# Altium PCB pcb.PcbDoc
Units mil, origin at the board's own origin, x right, y up, seen from the top; angles counter-clockwise.
Board outline 1968.5 x 885.83 mil, 2 copper layers (Top Layer, Bottom Layer); 32 components, 29 nets, 182 pads, 28 vias.
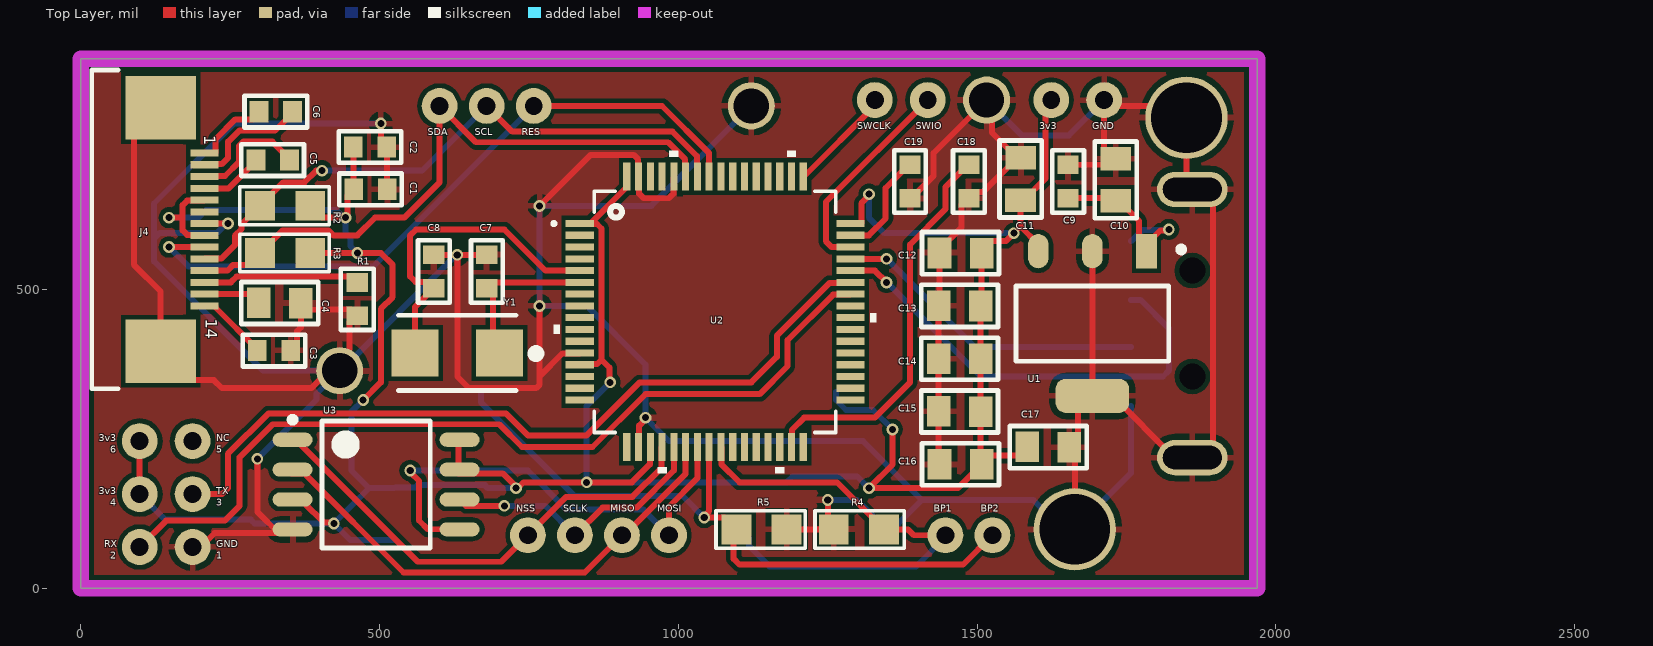
[diagram p0: Top Layer view]
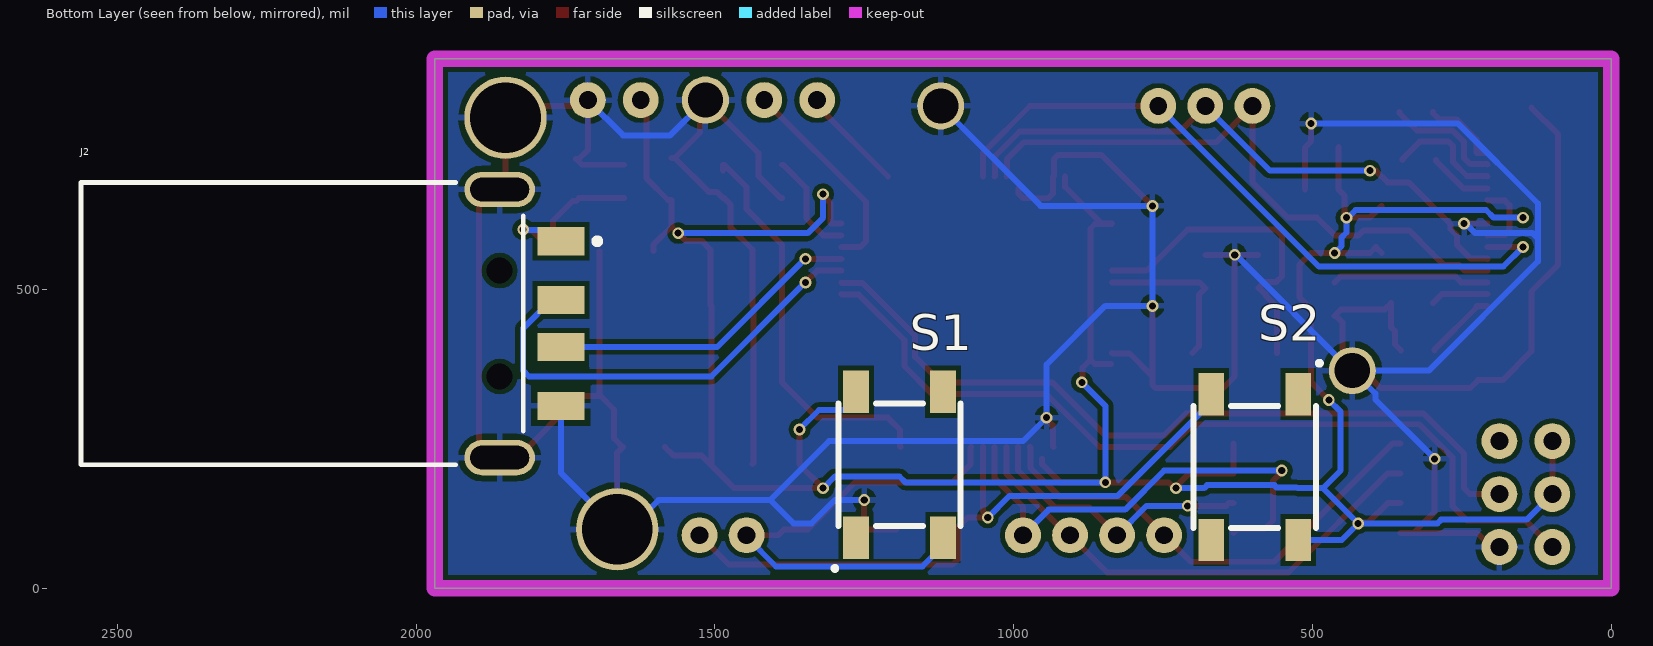
[diagram p1: Bottom Layer view, seen from below]
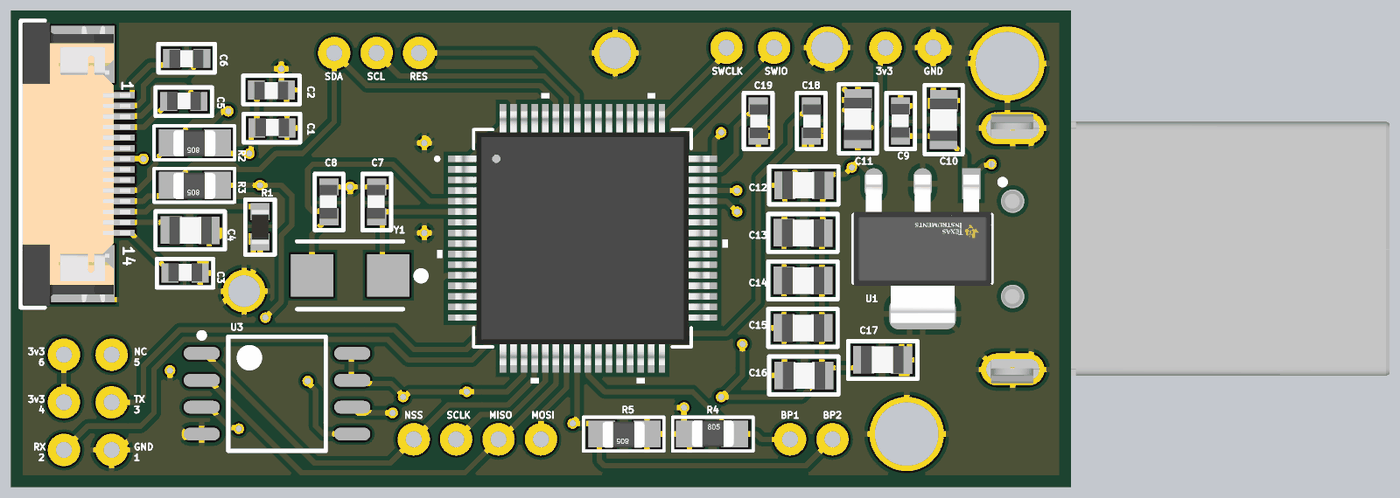
[diagram p2: 3D render of the assembled board from above, using the file's embedded part models]

## Layer stack, top to bottom
Top Solder: solder mask 0.4, Solder Resist, Dk 3.5
Top Layer: signal copper 1.4
Dielectric 1: dielectric 12.6, FR-4, Dk 4.8
Bottom Layer: signal copper 1.4
Bottom Solder: solder mask 0.4, Solder Resist, Dk 3.5

## Board outline
0,0 0,885.83 1968.5,885.83 1968.5,0
cut-out: 1285,1639.84

## Design rules (kind name [scope] priority, off if disabled: settings)
Clearance [All] p1: gap=7.87 ignorepadtopadclearanceinfootprint=FALSE
PolygonConnect [All] p1: connectstyle=Relief reliefconductorwidth=10 reliefentries=4 polygonreliefangle="90 Angle" airgapwidth=10
RoomDefinition mainSheet [InComponentClass('mainSheet')] p1: confinementstyle=ConfineIn formatcopy=TRUE lockcomponents=FALSE outline 77.58,1228.78 1793.58,1228.78 1793.58,2218.78 77.58,2218.78
RoutingVias [All] p1: holewidth=19.68 width=19.68 viastyle="Through Hole" minholewidth=11.81 minwidth=19.68 maxholewidth=28 maxwidth=50
SolderMaskExpansion [All] p1: expansion=4
Width [All] p1: maxlimit=25 minlimit=1 preferedwidth=10
30 further rules are at their usual default settings.

## Components (designator, comment, footprint, x,y, rotation, side; value= is the part's Value field where it differs from the comment)
C1 "CMS_0603" CONDENSATEUR_CMS_0603 512.62,667.55 r180 top
C2 "CMS_0603" CONDENSATEUR_CMS_0603 455.81,738.19 r0 top
C3 "CMS_0603" CONDENSATEUR_CMS_0603 351.28,397.85 r180 top
C4 "CMS_0805" CONDENSATEUR_CMS_0805 297.73,477.54 r0 top
C5 "CMS_0603" CONDENSATEUR_CMS_0603 348.91,716.76 r180 top
C6 "CMS_0603" CONDENSATEUR_CMS_0603 298.33,797.24 r0 top
C7 "CMS_0603" CONDENSATEUR_CMS_0603 679.13,557.97 r270 top
C8 "CMS_0603" CONDENSATEUR_CMS_0603 590.55,557.97 r270 top
C9 "CMS_0603" CONDENSATEUR_CMS_0603 1652.19,708.66 r270 top
C10 "CMS_0805" CONDENSATEUR_CMS_0805 1732.28,718.5 r270 top value=10µF
C11 "CMS_0805" CONDENSATEUR_CMS_0805 1572.89,720.08 r270 top value=33µF
C12 "CMS_0805" CONDENSATEUR_CMS_0805 1507.48,560.63 r180 top
C13 "CMS_0805" CONDENSATEUR_CMS_0805 1435.43,472.67 r0 top value=100nF
C14 "CMS_0805" CONDENSATEUR_CMS_0805 1435.43,384.31 r0 top value=100nF
C15 "CMS_0805" CONDENSATEUR_CMS_0805 1435.43,295.95 r0 top value=100nF
C16 "CMS_0805" CONDENSATEUR_CMS_0805 1437.01,207.6 r0 top value=100nF
C17 "CMS_0805" CONDENSATEUR_CMS_0805 1654.1,235.97 r180 top value=100nF
C18 "CMS_0603" CONDENSATEUR_CMS_0603 1486.22,652.66 r90 top
C19 "CMS_0603" CONDENSATEUR_CMS_0603 1387.8,652.66 r90 top
J2 "480-37-1000" MOLX-480-37-1000_V 1809.06,442.91 r270 bottom
J4 "68711414022" 68711414022 105.91,600.39 r270 top
R1 "RESISTANCE_CMS_0603" RESISTANCE_CMS_0603 462.6,455.81 r90 top value=820k
R2 "RESISTANCE_CMS_0805" RESISTANCE_CMS_0805 383.86,640.03 r180 top value=2k
R3 "RESISTANCE_CMS_0805" RESISTANCE_CMS_0805 383.86,561.02 r180 top value=2k
R4 "RESISTANCE_CMS_0805" RESISTANCE_CMS_0805 1260.1,98.43 r0 top value=2k
R5 "RESISTANCE_CMS_0805" RESISTANCE_CMS_0805 1181.1,98.43 r180 top value=2k
S1 "SKQGAFE010" SKQGAKE010 1190.94,206.69 r90 bottom
S2 "SKQGAFE010" SKQGAKE010 596.46,202.76 r270 bottom
U1 "LM3940IMP-3.3/NOPB" FP-DCY0004A-IPC_C 1692.91,442.91 r270 top
U2 "STM32F103RBT6" LQFP64-10x10mm 1061.32,462.6 r0 top
U3 "W25Q128FVSIG" WINB-SOIC-8_N 494.09,173.43 r0 top
Y1 "QC5CB8.00000F18B23R" QC5CB 629.92,393.7 r180 top

## Footprints (in the part's own frame and the unit in brackets; to place one, negate y for a bottom-side part, rotate by r counter-clockwise, add the part's x,y. Pads: shape width x height; smd on the part's side, far side on the other; paste and mask are expansions set on the pad)
68711414022 [mm] "ZIF Connectors, Horizontal, Top Contact, pitch 0.5mm, 14p"
  rect 0.3x1.2 smd: 1(-3.25,2.56) 2(-2.75,2.56) 3(-2.25,2.56) 4(-1.75,2.56) 5(-1.25,2.56) 6(-0.75,2.56) 7(-0.25,2.56) 8(0.25,2.56) 9(0.75,2.56) 10(1.25,2.56) 11(1.75,2.56) 12(2.25,2.56) 13(2.75,2.56) 14(3.25,2.56)
  rect 2.7x3 smd: MP1(-5.18,0.7) MP2(5.18,0.7)
  silkscreen extent -6.77,-2.22 6.78,-1.1, body extent -6.7,-2.15 6.7,2.95, height 2.1
CONDENSATEUR_CMS_0603 [mm] "CONDENSATEUR CMS 0603 ; DIMENSIONS : 1.6mm x 0.86mm"
  rect 0.8x0.9 smd: 1(0,0) 2(1.422,0)
  silkscreen extent -0.62,-0.67 2.04,0.68, body extent -0.1,-0.46 1.5,0.4, height 0.85
CONDENSATEUR_CMS_0805 [mm] "CONDENSATEUR CMS 0805 ; DIMENSIONS : 2mm x 1.25mm"
  rect 1x1.3 smd: 1(0,0) 2(1.79,-0.01)
  silkscreen extent -0.74,-0.9 2.53,0.89, body extent -0.09,-0.67 1.91,0.64, height 0.73
FP-DCY0004A-IPC_C [mm]
  rect 1.454x0.873 smd paste+0 mask+0: 1(-3.075,2.3)
  rrect100% 1.454x0.873 smd paste+0 mask+0: 2(-3.075,0) 3(-3.075,-2.3)
  rrect60% 1.454x3.132 smd paste+0 mask+0: 4(3.075,0)
  silkscreen extent -3.27,-3.25 1.6,3.9, body extent -3.9,-3.35 3.9,3.35, height 0.25
LQFP64-10x10mm [mil]
  rect 47x12 smd paste+0 mask+0: 1(-226.38,147.64) 2(-226.38,127.95) 3(-226.38,108.27) 4(-226.38,88.58) 5(-226.38,68.9) 6(-226.38,49.21) 7(-226.38,29.53) 8(-226.38,9.84) 9(-226.38,-9.84) 10(-226.38,-29.53) 11(-226.38,-49.21) 12(-226.38,-68.9) 13(-226.38,-88.58) 14(-226.38,-108.27) 15(-226.38,-127.95) 16(-226.38,-147.64) 33(226.38,-147.64) 34(226.38,-127.95) 35(226.38,-108.27) 36(226.38,-88.58) 37(226.38,-68.9) 38(226.38,-49.21) 39(226.38,-29.53) 40(226.38,-9.84) 41(226.38,9.84) 42(226.38,29.53) 43(226.38,49.21) 44(226.38,68.9) 45(226.38,88.58) 46(226.38,108.27) 47(226.38,127.95) 48(226.38,147.64)
  rect 12x47 smd paste+0 mask+0: 17(-147.64,-226.38) 18(-127.95,-226.38) 19(-108.27,-226.38) 20(-88.58,-226.38) 21(-68.9,-226.38) 22(-49.21,-226.38) 23(-29.53,-226.38) 24(-9.84,-226.38) 25(9.84,-226.38) 26(29.53,-226.38) 27(49.21,-226.38) 28(68.9,-226.38) 29(88.58,-226.38) 30(108.27,-226.38) 31(127.95,-226.38) 32(147.64,-226.38) 49(147.64,226.38) 50(127.95,226.38) 51(108.27,226.38) 52(88.58,226.38) 53(68.9,226.38) 54(49.21,226.38) 55(29.53,226.38) 56(9.84,226.38) 57(-9.84,226.38) 58(-29.53,226.38) 59(-49.21,226.38) 60(-68.9,226.38) 61(-88.58,226.38) 62(-108.27,226.38) 63(-127.95,226.38) 64(-147.64,226.38)
  silkscreen extent -273,-270 270,270, body extent -236,-236 236,236, height 63
MOLX-480-37-1000_V [mm] "CONN, 4-Leads, Body 12x18.8mm"
  rect 1.2x2 smd: 1(-3.5,1.3) 2(-1,1.3) 3(1,1.3) 4(3.5,1.3)
  oval 1.5x3 hole 1 slot 2.5 at 90 deg: 5(-5.7,-1.3) 6(5.7,-1.3)
  round 0.5 hole 1.1 unplated: MH1(-2.25,-1.3) MH2(2.25,-1.3)
  silkscreen extent -6,-19.1 6,2.97, body extent -6.35,-19.08 6.35,2.2, height 3.07
QC5CB [mm]
  rect 2x2 smd: 1(-1.8,0) 2(1.8,0)
  silkscreen extent -3.5,-1.6 2.5,1.6
RESISTANCE_CMS_0603 [mm] "RESISTANCE CMS 0603 ; DIMENSIONS : 1.6mm x 0.8mm"
  rect 0.8x0.9 smd: 1(0,0) 2(1.422,0)
  silkscreen extent -0.6,-0.7 2,0.7, body extent -0.1,-0.4 1.5,0.4, height 0.44
RESISTANCE_CMS_0805 [mil] "RESISTANCE CMS 0805 ; DIMENSIONS : 2mm x 1.25mm"
  rect 50x50 smd: 1(0,0) 2(84,0)
  silkscreen extent -31,-31 118,31, body extent 4,-24 83,26, height 31
SKQGAKE010 [mm]
  rect 1.8x1.1 smd: 1(-3.1,1.85) 2(3.1,1.85) 3(-3.1,-1.85) 4(3.1,-1.85)
  silkscreen extent -4.47,-2.6 2.6,2.81
WINB-SOIC-8_N [mm] "SOIC, 8-Leads, Body 5.4x5.4mm, Pitch 1.27mm, IPC Medium Density"
  oval 1.7x0.6 smd: 1(-3.55,1.905) 2(-3.55,0.635) 3(-3.55,-0.635) 4(-3.55,-1.905) 5(3.55,-1.905) 6(3.55,-0.635) 7(3.55,0.635) 8(3.55,1.905)
  silkscreen extent -3.67,-2.7 2.3,2.88, body extent -2.7,-2.7 2.7,2.7, height 2.16

## Part data
C1 C2 C3 C5 C6 C7 C8 C9 C18 C19: library part CONDENSATEUR_CMS_CER_0603, "CONDENSATEUR CMS CERAMIQUE 0603", Type=CMS_0603
  C1 C2: Condo=1µF
  C3 C18 C19: Condo=2.2µF
  C5 C6: 16v X5R=1µF
  C7 C8: Condo=12pF
  C9: Condo=0.47µF
C4 C10 C11 C12 C13 C14 C15 C16 C17: library part CONDENSATEUR_CMS_CER_0805, "CONDENSATEUR CMS CERAMIQUE 0805", Type=CMS_0805
  C4 C12: 16v / x7r=4.7µF
J2: library part CMP-1676-00005-1, "Universal Serial Bus (USB) Shielded I/O Plug, Type A, Right Angle Connector, 1.5 A, -20 to 85 degC, 4-Pin SMD, RoHS, Tray", Case\Package=0603, Case Code (Metric)=1608, Max Operating Temperature="155 degC", Min Operating Temperature="-55 degC", Package Quantity=5000, Power Rating="100 mW", Resistance="1 mohm", Tolerance=1%, Voltage Rating="50 V", Case Code (Imperial)=0603, ComponentLink1Description="Manufacturer URL", ComponentLink1URL=http://www.molex.com/, ComponentLink2Description=Datasheet, ComponentLink2URL=http://www.molex.com/pdm_docs/sd/480371000_sd.pdf, DatasheetVersion="Rev. D, 06/2004", Height="0.45 mm", Length="1.6 mm", Mount="Surface Mount", PackageDescription="4-Pin Surface Mount Device, Body 12 x 18.8 mm", PackageReference=480-37-1000, Packaging="Tape and Reel", Pins=2, REACH SVHC="No SVHC", RoHSCompliant=true, Voltage Rating (DC)="50 V", Width="0.8 mm"
J4: library part CMP-1502-01553-1, "SMT ZIF Connectors WR-FPC, Horizontal, Top Contact, pitch 0.5 mm, 14 pins", Contact Resistance=20mOhm, Manufacturer="Wurth Elektronik", Operating Temperature=-25to85degC, Rated Current=0.5A, Withstanding Voltage=250VAC, Working Voltage=50VAC, Contact Design=TopContact, Datasheet URL=https://katalog.we-online.de/em/datasheet/68711414022.pdf, Manufacturer URL=http://www.we-online.de, Mounting Technology=SMT, Orientation=Horizontal, Package Reference=68711414022, Packaging=TapeandReel, Part Number=68711414022, Pin Number=14, Pitch=0.5mm, Publisher=WurthElektronik
R1: "RESISTANCE CMS 0603", Type=CMS_0603
R2 R3 R4 R5: "RESISTANCE CMS 0805", Type=CMS_0805
S1 S2: "Switch", Manufacturer_Name="ALPS Electric", RS Part Number=7582060P, Datasheet Link=http://uk.rs-online.com/web/p/products/7582060P, Manufacturer_Part_Number=SKQGAFE010, RS Price/Stock=http://uk.rs-online.com/web/p/products/7582060P
U1: library part CMP-0062-01788-4, "IC REG LINEAR 3.3V 1A SOT223-4", Case/Package=SOT-223, Current Rating=1A, Dropout Voltage=500mV, Max Input Voltage=7.5V, Max Operating Temperature=125°C, Max Output Voltage=3.3V, Min Input Voltage=4.5V, Min Operating Temperature=-40°C, Package Quantity=1000, Quiescent Current=15mA, Contact Plating=Tin, Height=1.6mm, Lead Free="Lead Free", Length=6.5mm, Max Output Current=1A, Max Supply Voltage=7.5V, Min Supply Voltage=4.5V, Mount="Surface Mount", Nominal Output Voltage=3.3V, Number of Outputs=1, Number of Pins=4, Number of Regulators=1, Output Configuration=Positive, Output Current=1A, Output Type=Fixed, Output Voltage=3.3V, Packaging="Tape and Reel", Polarity=Positive, Radiation Hardening=No, REACH SVHC="No SVHC", Series=-, Termination=SMD/SMT, Width=3.56mm
U2: "No Description Available", Mfr_Name=STMicroelectronics, Copyright="Copyright (C) 2022 Ultra Librarian. All rights reserved.", Manufacturer_Part_Number=STM32F103RBT6, RefDes=RefDes, Type=DEV
U3: library part CMP-2000-05005-1, "3V 128M-Bit Serial Flash Memory with Dual/Quad SPI & QPI, 2.7 to 3.6 V, -40 to 85 degC, 8-Pin SOIC, RoHS, Tape and Reel", Manufacturer=Winbond, Operating Supply Voltage (Max)=3.6V, Operating Supply Voltage (Min)=2.7V, Operating Supply Voltage (Typ)=3/3.3V, Operating Temperature (Max)=85C, Operating Temperature (Min)=-40C, Operating Temperature Classification=Industrial, Operating Temp Range=-40Cto85C, Package Description="8-Pin Small Outline Integrated Circuit, Body 5.28 x 5.28 mm, Pitch 1.27 mm", Package Reference=SS-8, Package Type=SOICW, Program/Erase Volt (Typ)=2.7to3.6V, Supply Current=20mA, Access Time (Max)=7ns, Address Bus=24b, Boot Type=NotRequired, Cell Type=NOR, Datasheet URL=http://download.siliconexpert.com/pdfs/2015/11/30/6/42/17/890/win_/manual/3w25q128fv20rev.l2008242015.pdf, Datasheet Version="Rev. L, 08/2015", Density=134217728Bit, Interface Type=Serial(SPI), Manufacturer URL=http://www.winbond.com/hq/index.html?__locale=en, Mounting=SurfaceMount, Number of Words=16777216, Pin Count=8, Programmable=Yes, Rad Hardened=No, Sync/Async=Synchronous, Word Size=8b
Y1: "Crystal or Oscillator", Manufacturer_Name=Qantek, RS Part Number=8136093P, Datasheet Link=http://uk.rs-online.com/web/p/products/8136093P, Manufacturer_Part_Number=QC5CB8.00000F18B23R, RS Price/Stock=http://uk.rs-online.com/web/p/products/8136093P

## Free pads (board coordinates)
  round 60 hole 30: 6(1417.32,816.93) 7(1328.74,816.93) 10(98.43,246.06) 11(98.43,157.48) 12(98.43,68.9) 13(187.01,246.06) 14(187.01,68.9) 15(187.01,157.48) 16(679.13,807.09) 17(600.39,807.09) 18(757.87,807.09) 19(1624.02,816.93) 20(1712.6,816.93) 21(748.03,88.58) 22(905.51,88.58) 24(826.77,88.58) 25(984.25,88.58) 25(1446.85,88.58) 25(1525.59,88.58)
  round 78.74 hole 59.06: 29(433.07,364.17) 29(1122.05,807.09) 29(1515.75,816.93)
  round 137.8 hole 118.11: 29(1663.39,98.43) 29(1850.39,787.4)

## Via types
v1: diameter 19.68, hole 11.81, Top Layer to Bottom Layer, 28 vias

## Nets (pads, with @x,y where several pads share a name; then routed paths per layer and width w, separated by ;. In a path a pad name is that pad's centre, name@x,y a point inside that pad or via, vN(x,y) a via of type N, cw(c..) or ccw(c..) an arc to the next point about the centre after c; other vN are vias at no path point)
3v3: C1.2 C2.1 C11.2 C12.1 C13.2 C14.2 C15.2 C16.2 C17.2 J4.5 J4.8 pad.10 pad.11 pad.19 R2.1 R3.1 S1.2 S2.2 U1.3 U3.3 U3.7 U3.8 | length 5422.1
  Top Layer w10: pad.11 pad.10 ; v1(147.64,620.08) 170.2,620.08 ; J4.8 205.79,591.46 177.74,591.46 170.2,599 170.2,620.08 ; J4.5 205.79,648.7 177.74,648.7 170.2,641.16 170.2,620.08 ; U3.3@352.36,142.32 374.02,142.32 406.22,110.12 421.38,110.12 v1(423.23,108.27) ; R3.1 393.7,570.87 403.54,561.02 v1(462.6,561.02) 501.97,561.02 521.65,541.34 521.65,487.2 501.97,467.52 501.97,344.49 v1(472.44,314.96) ; R2.1 403.81,620.08 v1(442.91,620.08) 442.91,622.7 445.87,625.65 445.87,656.8 C1.2 456.62,737.38 C2.1 ; U3.8@631.89,242.32 631.89,192.32 705.97,192.32 730.97,167.32 740.81,177.17 v1(846.46,177.17) 922.02,177.17 952.24,207.39 952.24,216.54 ; 834.94,610.24 852.44,610.24 913.68,671.48 913.68,688.98 ; 835.75,609.43 863.78,609.43 871.32,601.88 871.32,382.37 ; 836.61,374.83 863.78,374.83 871.32,382.37 ; v1(885.83,344.49) 884.36,345.96 884.36,369.33 871.32,382.37 ; 1287.7,610.24 1305.2,610.24 1306.2,611.24 1306.2,644.13 1318.9,656.83 v1(1318.9,659.45) ; v1(1358.27,265.75) 1358.27,206.69 v1(1318.9,167.32) 1467.6,167.32 C16.2 ; C17.2 1568.95,221.68 1521.96,221.68 C16.2 ; U1.3 1602.36,575.41 1572.5,605.27 ; pad.19@1614.17,816.93 pad.19@1614.17,807.09 ; pad.19 pad.19@1614.17,807.09 ; C16.2 1505.91,208.78 C15.2 C14.2 C13.2 1507.48,473.85 C12.1 1507.48,566.54 1522.17,581.22 1548.45,581.22 v1(1561.37,594.14) 1572.5,605.27 ; 1572.5,605.27 C11.2 1578.41,649.61 1614.17,685.37 pad.19@1614.17,807.09
  Bottom Layer w10: pad.11 141.3,114.61 284.55,114.61 290.89,108.27 v1(423.23,108.27) ; v1(147.64,620.08) 196.43,620.08 209.3,632.95 427.42,632.95 440.29,620.08 v1(442.91,620.08) 442.91,595.24 450.9,587.25 450.9,572.72 v1(462.6,561.02) ; v1(472.44,314.96) 452.76,295.28 452.76,196.85 482.28,167.32 ; S2.2 450.79,80.71 v1(423.23,108.27) ; v1(728.35,167.32) 681.1,167.32 676.1,172.32 563.57,172.32 559.63,168.39 526.16,168.39 525.1,167.32 482.28,167.32 ; v1(885.83,344.49) 846.46,305.12 v1(846.46,177.17) 1181.1,177.17 1190.94,187.01 1299.21,187.01 v1(1318.9,167.32) ; S1.2 1263.78,314.96 1280.43,298.31 1325.71,298.31 v1(1358.27,265.75) ; v1(1318.9,659.45) 1318.9,620.08 1344.83,594.14 v1(1561.37,594.14) ; v1(423.23,108.27) 482.28,167.32
5v: C9.2 C10.2 J2.1 U1.1 | length 320.8
  Top Layer w10: C9.2 1727.26,652.66 C10.2 1737.8,648.03 1771.27,614.55 1771.27,576.17 U1.1 1783.46,575.41 1806.6,598.54 1819.01,598.54 v1(1820.87,600.39)
  Bottom Layer w10: J2.1 1776.5,599.33 1819.8,599.33 v1(1820.87,600.39)
BP1: pad.25@1446.85,88.58 R4.2 S1.3 U2.25 | length 833.5
  Top Layer w10: U2.25 1071.97,235.41 1071.97,207.39 1102.2,177.17 1265.36,177.17 R4.2 1384.1,98.43 1393.95,88.58 pad.25@1446.85,88.58
  Bottom Layer w10: S1.3 1118.11,70.87 1152.64,36.34 1397.64,36.34 1446.85,85.55 pad.25@1446.85,88.58
BP2: pad.25@1525.59,88.58 R5.2 S2.3 U2.24 | length 1155.8
  Top Layer w10: U2.24 1051.48,128.9 1043.31,120.73 v1(1043.31,118.11) 1077.1,118.11 1092.52,102.69 1092.52,49.21 1102.36,39.37 1476.38,39.37 pad.25@1525.59,88.58
  Bottom Layer w10: S2.3 669.29,311.02 825.87,154.45 1006.97,154.45 v1(1043.31,118.11)
D+: J2.3 U2.45 | length 531.3
  Top Layer w10: U2.45 v1(1348.43,551.18)
  Bottom Layer w10: v1(1348.43,551.18) 1496.06,403.54 J2.3
D-: J2.2 U2.44 | length 764.1
  Top Layer w10: U2.44 1287.78,531.42 1328.82,531.42 v1(1348.43,511.81)
  Bottom Layer w10: v1(1348.43,511.81) 1505.91,354.33 1811.02,354.33 1820.87,364.17 1820.87,435.04 1773.62,482.28 J2.2
FPRX: pad.12 U2.42 | length 1469.3
  Top Layer w10: pad.12 142.58,113.05 241,113.05 265.75,137.8 265.75,219.13 320.98,274.37 700.04,274.37 738.19,236.22 856.3,236.22 944.88,324.8 1135.87,324.8 1182.61,371.54 1182.61,415.05 1258.87,491.31 1286.89,491.31 U2.42
FPTX: pad.15 U2.43 | length 1331.9
  Top Layer w10: pad.15 236.22,157.48 246.06,167.32 246.06,224.73 313.58,292.24 711.69,292.24 748.03,255.91 846.46,255.91 935.04,344.49 1122.05,344.49 1164.73,387.17 1164.73,422.46 1253.27,511 1286.89,511 U2.43
GND: C1.1 C2.2 C3.1 C4.2 C7.1 C8.1 C9.1 C10.1 C11.1 C12.2 C13.1 C14.1 C15.1 C16.1 C17.1 C18.1 C19.1 J2.4 J2.5 J2.6 J4.7 pad.14 pad.20 pad.29 R1.1 R4.1 R5.1 U1.2 U1.4 U2.60 U3.4 | length 9191.9
  Top Layer w10: 133.46,804.33 88.58,759.45 88.58,541.34 133.46,496.46 133.46,396.46 181.61,348.31 222.56,348.31 236.22,334.65 385.71,334.65 415.24,364.17 433.07,364.17 433.07,382.77 449.88,399.59 449.88,445.06 460.63,455.81 R1.1 451.85,466.56 378.79,466.56 C4.2 368.2,436.56 362.02,430.38 362.02,408.59 C3.1 ; pad.14 200.54,68.9 223.96,92.32 U3.4@330.71,92.32 ; J4.7 v1(246.06,610.23) ; v1(295.28,216.54) 295.28,127.76 U3.4@330.71,92.32 ; U3.4@352.36,92.32 U3.4@330.71,92.32 ; v1(501.97,777.56) 501.97,748.03 C2.2 512.62,737.38 C1.1 ; C8.1 v1(629.92,557.97) ; C7.1 v1(629.92,557.97) ; v1(767.72,472.44) 767.72,354.5 ; v1(767.72,639.76) 853.3,725.35 925.02,725.35 932.56,717.81 932.56,689.79 933.37,688.98 934.18,688.17 934.18,660.14 941.72,652.6 984.07,652.6 991.61,660.14 U2.60@991.61,669.29 ; 834.94,393.7 834.13,392.89 806.11,392.89 767.72,354.5 ; 933.37,236.22 934.18,237.03 934.18,272.11 944.88,282.81 v1(944.88,285.43) ; R5.1@1195.94,98.43 R4.1 1250,108.53 v1(1250,147.64) ; C19.1 1389.76,652.66 1427.17,690.06 1427.17,728.35 1515.75,816.93 1524.51,808.17 1524.51,762.56 C11.1@1566.99,720.08 ; C16.1 1435.43,209.17 C15.1 C14.1 C13.1 1437.01,474.24 C12.2 1437.01,566.93 1473.5,603.43 1473.5,641.91 1484.25,652.66 C18.1 1496.97,663.41 1510.32,663.41 C11.1@1566.99,720.08 ; C11.1 C11.1@1566.99,720.08 ; C9.1 1722.44,708.66 C10.1 1727.28,718.5 1712.6,733.19 pad.20 1722.17,807.36 1830.43,807.36 1850.39,787.4 1850.39,677.17 J2.5 1872.1,667.32 1894.76,644.66 1894.76,241.16 1872.1,218.5 J2.6 1830,218.5 1726.65,321.85 U1.4 U1.4@1691.49,321.85 ; pad.29@1663.39,98.43 1663.39,226.69 C17.1 1668.79,250.66 1668.79,299.15 U1.4@1691.49,321.85 ; U1.2 1692.91,323.28 U1.4@1691.49,321.85 ; v1(629.92,557.97) 629.92,354.33 649.61,334.65 761.86,334.65 767.72,340.5 767.72,354.5
  Bottom Layer w10: v1(246.06,610.23) 243.44,610.23 227.45,594.24 131.64,594.24 122.25,584.85 ; v1(295.28,216.54) 394.63,315.89 394.63,325.73 pad.29@433.07,364.17 ; v1(501.97,777.56) 255.91,777.56 122.25,643.91 122.25,584.85 ; v1(629.92,557.97) 628.39,557.97 434.6,364.17 pad.29@433.07,364.17 ; pad.29@1122.05,807.09 954.72,639.76 v1(767.72,639.76) v1(767.72,472.44) 846.46,472.44 944.88,374.02 v1(944.88,285.43) 984.25,246.06 1309.06,246.06 1407.48,147.64 ; v1(1250,147.64) 1299.21,147.64 1338.58,108.27 1368.11,108.27 1407.48,147.64 ; pad.29@1515.75,816.93 1574.8,757.87 1653.54,757.87 pad.20 ; J2.4 1757.87,192.91 1663.39,98.43 1643.16,98.43 1593.95,147.64 1407.48,147.64 ; 122.25,584.85 122.25,547.04 305.12,364.17 pad.29@433.07,364.17
MISO: pad.22 U2.22 U3.2 | length 841.7
  Top Layer w10: U3.2@352.36,192.32 374.02,192.32 540,26.34 843.27,26.34 pad.22 909.27,88.58 1012.11,191.42 U2.22
MOSI: pad.25@984.25,88.58 U2.23 U3.5 | length 809.6
  Top Layer w10: v1(551.18,196.85) 551.18,194.23 565.87,179.54 565.87,113.27 580.52,98.62 625.6,98.62 U3.5@631.89,92.32 ; pad.25@984.25,88.58 984.25,136.55 1031.79,184.09 U2.23
  Bottom Layer w10: v1(551.18,196.85) 748.03,196.85 813.43,131.46 941.38,131.46 pad.25@984.25,88.58
NetC3_2: C3.2 J4.14 | length 121.7
  Top Layer w10: J4.14 224.41,472.44 225.32,471.54 225.32,469.78 295.28,399.81 C3.2
NetC4_1: C4.1 J4.13 | length 97.1
  Top Layer w10: J4.13 283.14,492.13 C4.1
NetC5_1: C5.1 J4.3 | length 196
  Top Layer w10: J4.3 207.6,689.88 241.24,689.88 264.29,712.93 264.29,739.81 271.83,747.35 320.29,747.35 348.91,718.73 C5.1
NetC5_2: C5.2 J4.4 | length 107
  Top Layer w10: J4.4 247.41,669.29 292.91,714.79 C5.2
NetC6_1: C6.1 J4.1 | length 135.6
  Top Layer w10: J4.1@207.6,729.25 J4.1 224.41,728.35 225.32,729.25 225.32,751.39 258.45,784.53 287.58,784.53 298.33,795.28 C6.1
NetC6_2: C6.2 J4.2 | length 201.2
  Top Layer w10: J4.2 207.6,709.57 235.65,709.57 246.41,720.33 246.41,747.21 265.07,765.87 324.93,765.87 354.33,795.28 C6.2
NetJ4_12: J4.12 R1.2 | length 264.1
  Top Layer w10: J4.12 250.91,511.81 260.75,521.65 452.76,521.65 R1.2
NSS: pad.21 U2.20 U3.1 | length 801.7
  Top Layer w10: U3.1@352.36,242.32 365.45,242.32 563.57,44.21 703.66,44.21 pad.21 812.22,152.77 922.9,152.77 971.93,201.8 971.93,235.41 U2.20
OSC_IN: C8.2 U2.5 Y1.2 | length 555.3
  Top Layer w10: Y1.2 559.06,470.47 577.83,489.25 577.83,491.22 588.58,501.97 C8.2 579.8,512.72 560.12,512.72 551.18,521.65 551.18,590.55 561.02,600.39 708.66,600.39 777.56,531.5 U2.5
OSC_OUT: C7.2 U2.6 Y1.1 | length 277.1
  Top Layer w10: Y1.1 689.88,404.61 689.88,491.22 C7.2 688.98,511.81 U2.6
RES: J4.9 pad.18 U2.57 | length 1163.7
  Top Layer w10: v1(147.64,570.87) J4.9 ; pad.18@757.87,816.93 767.72,807.09 972.58,807.09 1051.48,728.18 U2.57
  Bottom Layer w10: v1(147.64,570.87) 180.2,538.31 489.09,538.31 pad.18
SCL: J4.10 pad.16 R2.2 U2.58 | length 1013.6
  Top Layer w10: J4.10 207.6,552.09 235.65,552.09 257.75,574.19 257.75,589.8 268.78,600.83 268.78,608.95 338.97,679.13 374.02,679.13 393.7,698.82 v1(403.54,698.82) ; pad.16 722.01,764.21 990.17,764.21 1030.98,723.4 1030.98,689.79 U2.58
  Bottom Layer w10: v1(403.54,698.82) 570.87,698.82 pad.16
SCLK: pad.24 U2.21 U3.6 | length 466.9
  Top Layer w10: U3.6@631.89,142.32 640.24,142.32 644.76,137.8 v1(708.66,137.8) ; pad.24 873.08,134.89 930.3,134.89 992.42,197.01 U2.21
  Bottom Layer w10: v1(708.66,137.8) 777.56,137.8 pad.24
SDA: J4.11 pad.17 R3.2 U2.59 | length 1066.8
  Top Layer w10: J4.11 245.32,531.5 254.84,541.02 279.86,541.02 R3.2 337.73,598.9 414.19,598.9 422.54,590.55 462.6,590.55 492.13,620.08 541.34,620.08 600.39,679.13 pad.17 661.14,746.34 982.77,746.34 1011.3,717.81 1011.3,689.79 U2.59
SWCLK: pad.7 U2.49 | length 177
  Top Layer w10: U2.49@1210.27,688.98 1328.74,807.44 pad.7
SWIO: pad.6 U2.46 | length 371.5
  Top Layer w10: U2.46 1256.67,570.87 1246.83,580.71 1246.83,646.43 pad.6 pad.6@1417.32,797.24
VCAP1: C18.2 | length 675.7
  Top Layer w10: 1189.27,236.22 1190.09,237.03 1190.09,265.05 1210.47,285.43 1328.74,285.43 1387.8,344.49 1387.8,575.29 1446.85,634.35 1446.85,671.26 1484.25,708.66 C18.2 C18.2@1486.22,698.82
VCAP2: C19.2 | length 179
  Top Layer w10: 1287.7,590.55 1318.9,590.55 1346.99,618.64 1346.99,669.82 1385.83,708.66 C19.2
pads on no net: J2.MH1 J2.MH2 J4.6 J4.MP1 J4.MP2 S1.1 S1.4 S2.1 S2.4 U2.1 U2.2 U2.3 U2.4 U2.7 U2.8 U2.9 U2.10 U2.11 U2.12 U2.13 U2.14 U2.15 U2.16 U2.17 U2.18 U2.19 U2.26 U2.27 U2.28 U2.29 U2.30 U2.31 U2.32 U2.33 U2.34 U2.35 U2.36 U2.37 U2.38 U2.39 U2.40 U2.41 U2.47 U2.48 U2.50 U2.51 U2.52 U2.53 U2.54 U2.55 U2.56 U2.61 U2.62 U2.63 U2.64

## Polygon pours and split planes (outlines as drawn)
GND on Bottom Layer "GND_L02_P016" (solid, pour order 16): 0,885.83 0,0 1968.5,0 1968.5,885.83
GND on Top Layer "GND_L01_P018" (solid, pour order 18): 0,885.83 0,0 1968.5,0 1968.5,885.83

## Keep-outs
Keep-Out Layer:
  the board outline again, w27.56

## Silkscreen, mask and mechanical layers (free items; w line width, h text height)
Top Overlay:
  circle w10: c895.67,629.92 r9.84
  text "SWCLK" at 1299.21,767.72 h11.81
  text "SWIO" at 1397.64,767.72 h11.81
  text "3v3" at 1604.33,767.72 h11.81
  text "GND" at 1692.91,767.72 h11.81
  text "SDA" at 580.71,757.87 h11.81
  text "SCL" at 659.45,757.87 h11.81
  text "RES" at 738.19,757.87 h11.81
  text "3v3" at 29.53,246.06 h11.81
  text "NC" at 226.38,246.06 h11.81
  text "6" at 49.21,226.38 h11.81
  text "5" at 226.38,226.38 h11.81
  text "3v3" at 29.53,157.48 h11.81
  text "TX" at 226.38,157.48 h11.81
  text "4" at 49.21,137.8 h11.81
  text "3" at 226.38,137.8 h11.81
  text "NSS" at 728.35,127.95 h11.81
  text "SCLK" at 807.09,127.95 h11.81
  text "MISO" at 885.83,127.95 h11.81
  text "MOSI" at 964.57,127.95 h11.81
  text "BP1" at 1427.17,127.95 h11.81
  text "BP2" at 1505.91,127.95 h11.81
  text "RX" at 39.37,68.9 h11.81
  text "GND" at 226.38,68.9 h11.81
  text "2" at 49.21,49.21 h11.81
  text "1" at 226.38,49.21 h11.81

## Text inside footprints (layer, text, board x,y; h text height)
J2: Mechanical 1 "PCB EDGE" at 1960.24,392.91 h19.68 r90
J4: Top Overlay "1" at 206.69,757.87 h19.68 r270; Top Overlay "14" at 208.66,450.79 h19.68 r270